# Altium PCB Logic adapter.PcbDoc
Units mm, origin at the board's own origin, x right, y up, seen from the top; angles counter-clockwise.
Board outline 50 x 30 mm, 2 copper layers (L1, L2), stack 0.93 mm thick; 81 components, 67 nets, 244 pads, 60 vias.
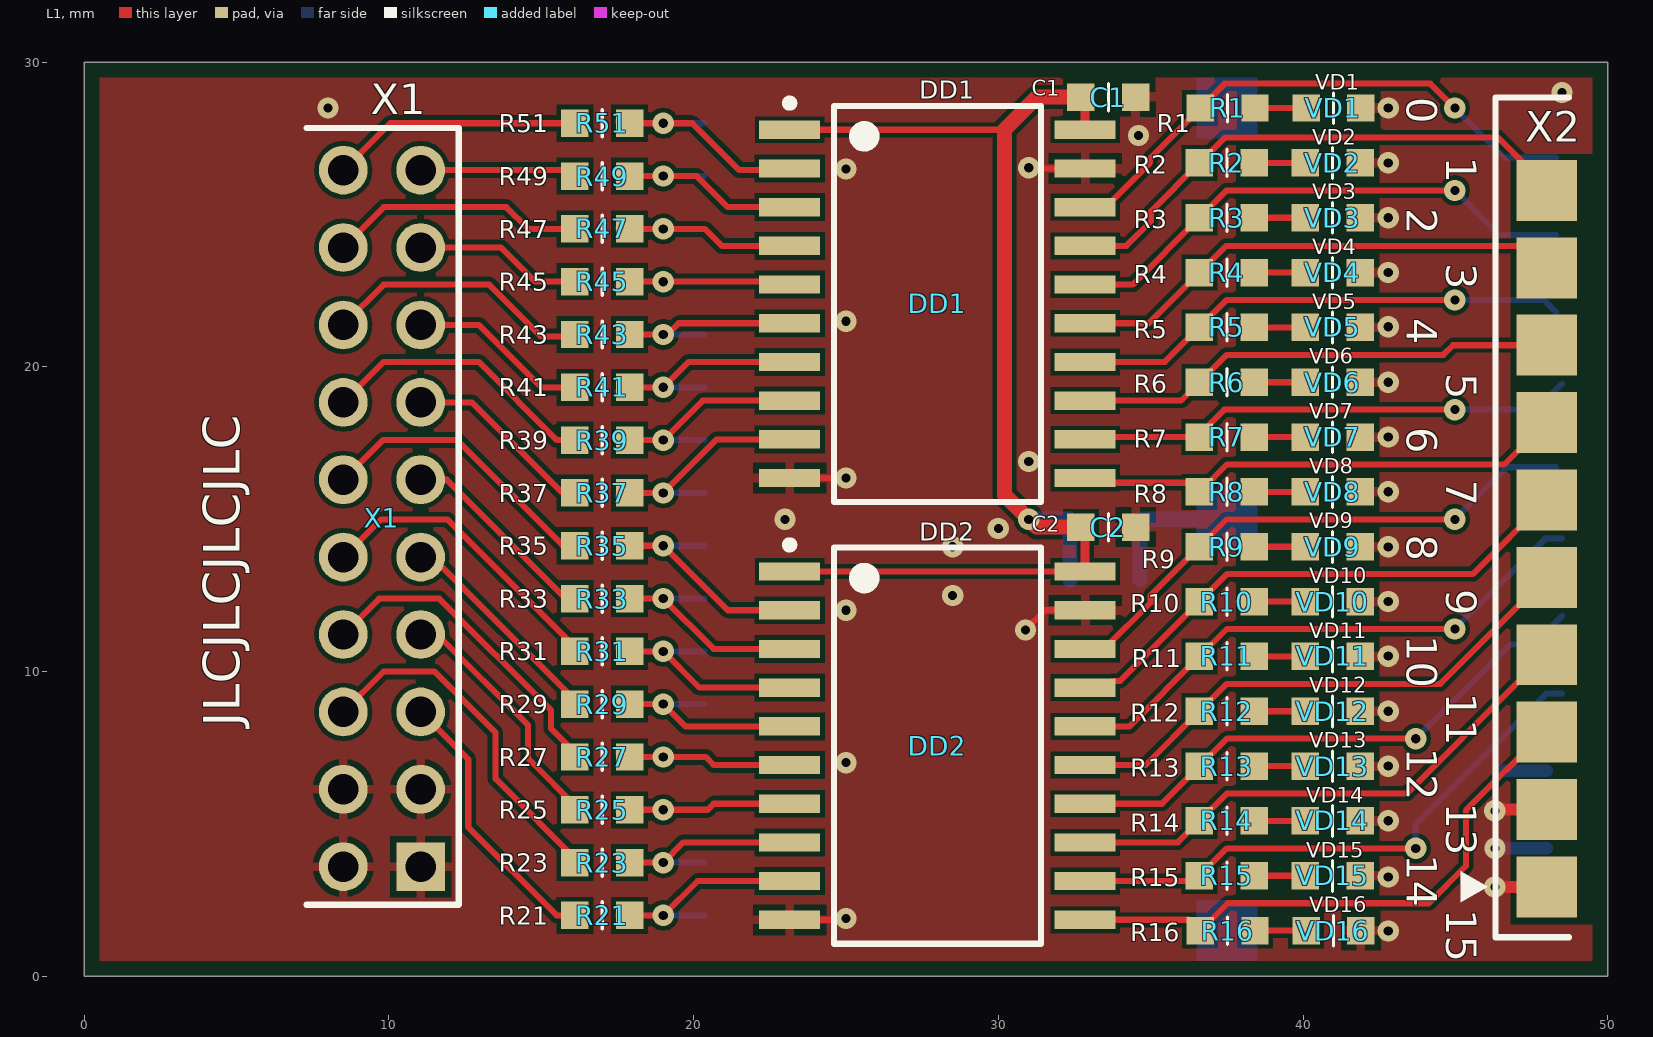
[diagram p0: L1 view]
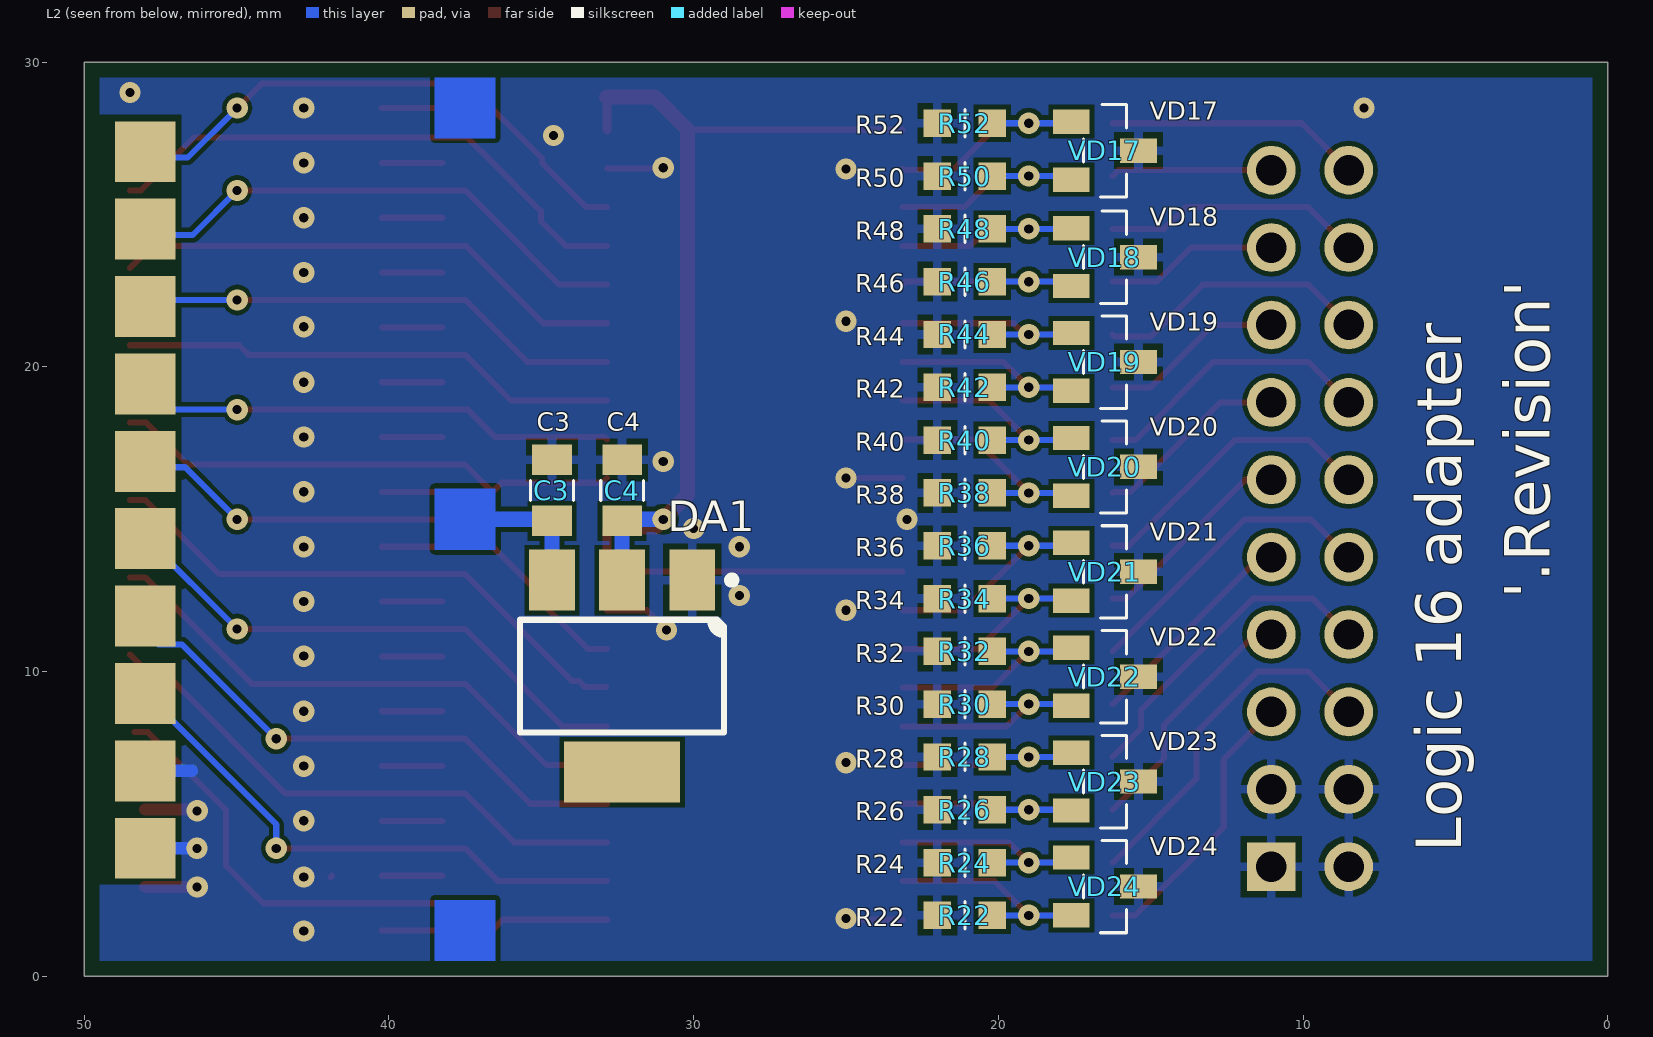
[diagram p1: L2 view, seen from below]
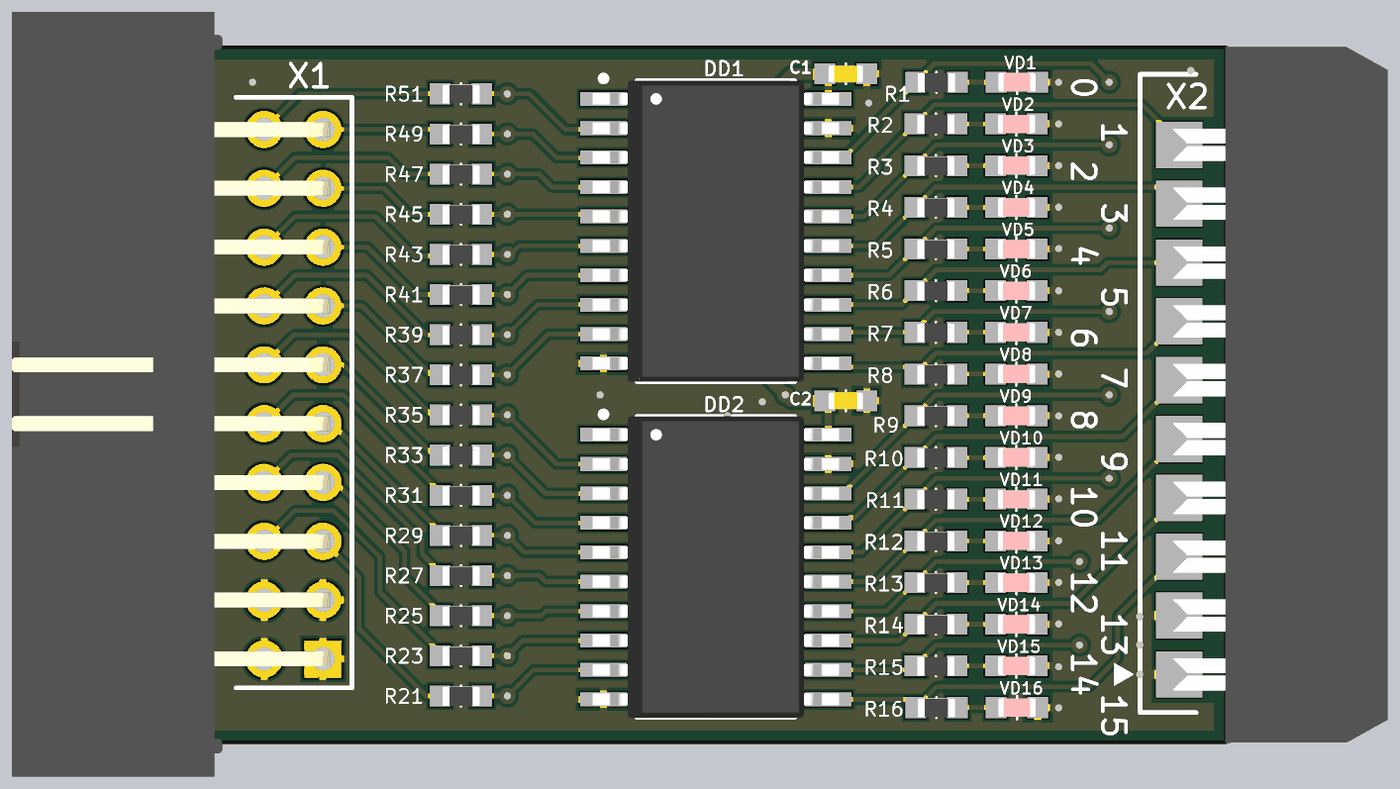
[diagram p2: 3D render of the assembled board from above, using the file's embedded part models]
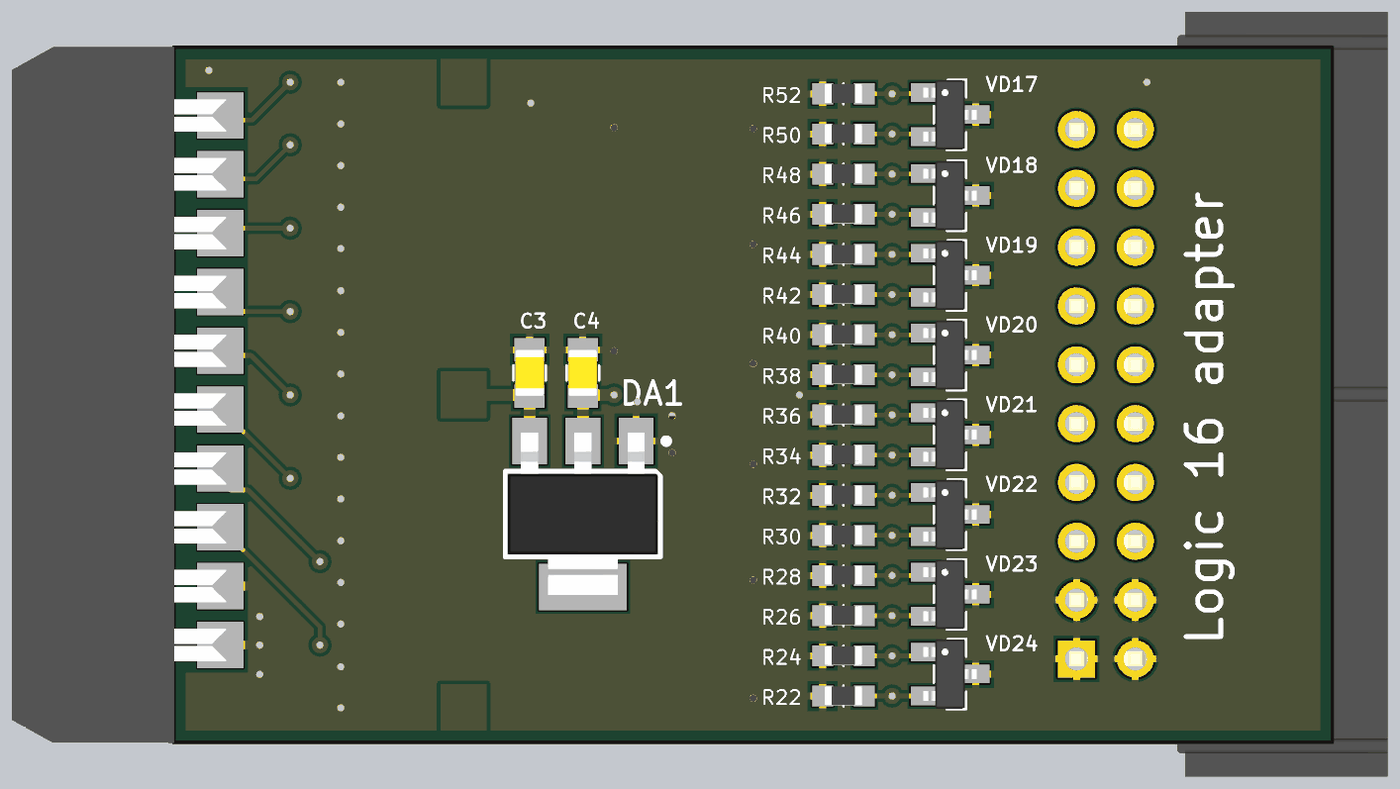
[diagram p3: 3D render of the assembled board from below, using the file's embedded part models]

## Layer stack, top to bottom
Top Solder: solder mask 0.03, Solder Resist, Dk 3.5
L1: signal copper 0.015
Core: core 0.9, FR-4, Dk 4.2
L2: signal copper 0.015
Bot Solder: solder mask 0.03, Solder Resist, Dk 3.5

## Board outline
0,0 50,0 50,30 0,30

## Design rules (kind name [scope] priority, off if disabled: settings)
BoardOutlineClearance KeepoutBoardOutline [(ObjectKind = 'Track') And (Keepout = 'True')] p1: gap=0 ignorepadtopadclearanceinfootprint=FALSE
BoardOutlineClearance IDC-20F [HasFootprint('IDC-20F-EDGE')] p2: gap=0 ignorepadtopadclearanceinfootprint=FALSE
BoardOutlineClearance BoardOutlineClearanceAll [All] p3: gap=0.5 ignorepadtopadclearanceinfootprint=FALSE
Clearance ClearanceNetA1_1 [InNet('NetA1_1')] p1 off: gap=0.15 ignorepadtopadclearanceinfootprint=FALSE except(0.2: Arc-Fill Arc-Poly Arc-Region Track-Fill Track-Poly Track-Region)
Clearance ClearanceTopSilk [OnLayer('Top Silk') vs OnLayer('L1')] p2: gap=0.15 ignorepadtopadclearanceinfootprint=FALSE except(0: Arc-Hole Track-Hole SMDPad-Hole THPad-Hole Via-Hole Fill-Hole Poly-Hole Region-Hole Text-Hole)
Clearance ClearanceBalun [HasFootprint('BALF-NRG-01D3')] p3: gap=0.1 ignorepadtopadclearanceinfootprint=FALSE except(0: Arc-Hole Track-Hole SMDPad-Hole THPad-Hole Via-Hole Fill-Hole Poly-Hole Region-Hole Text-Hole) // BALF-NRG-01D3
Clearance ClearanceBalun_CC112X [HasFootprint('BALF-112X-01D3')] p4: gap=0.1 ignorepadtopadclearanceinfootprint=FALSE except(0: Arc-Hole Track-Hole SMDPad-Hole THPad-Hole Via-Hole Fill-Hole Poly-Hole Region-Hole Text-Hole) // BALF-NRG-01D3
Clearance ClearancePolygonANT [InNet('ANT') vs InPoly] p5: gap=0.45 ignorepadtopadclearanceinfootprint=FALSE except(0: Arc-Hole Track-Hole SMDPad-Hole THPad-Hole Via-Hole Fill-Hole Poly-Hole Region-Hole Text-Hole)
Clearance Wire_Jumpers [HasFootprint('WIRE')] p6: gap=0.01 ignorepadtopadclearanceinfootprint=FALSE except(0: Arc-Hole Track-Hole SMDPad-Hole THPad-Hole Via-Hole Fill-Hole Poly-Hole Region-Hole Text-Hole) // Pour over wire jumpers
Clearance VD [All vs HasFootprint('DPF(S-PX2SON-N6)')] p7: gap=0.1 ignorepadtopadclearanceinfootprint=FALSE except(0: Arc-Hole Track-Hole SMDPad-Hole THPad-Hole Via-Hole Fill-Hole Poly-Hole Region-Hole Text-Hole) // For small diods (ECD protection)
Clearance L1 [OnLayer('L1')] p8: gap=0.15 ignorepadtopadclearanceinfootprint=FALSE except(0: Arc-Hole Track-Hole SMDPad-Hole THPad-Hole Via-Hole Fill-Hole Poly-Hole Region-Hole Text-Hole)
Clearance L2 [OnLayer('L2')] p9: gap=0.15 ignorepadtopadclearanceinfootprint=FALSE except(0: Arc-Hole Track-Hole SMDPad-Hole THPad-Hole Via-Hole Fill-Hole Poly-Hole Region-Hole Text-Hole)
ComponentClearance PowerConnector [(ObjectKind = '3D Body') And (Identifier = '039012040')] p1: gap=0 collisioncheckmode=3 verticalgap=0 showdistances=FALSE
ComponentClearance MezzanineConnectors [InComponent('X7') or InComponent('X8') vs (ObjectKind = '3D Body') And (Identifier = 'mezzanine')] p2: gap=0 collisioncheckmode=3 verticalgap=0 showdistances=FALSE
ComponentClearance [(ObjectKind = '3D Body') And (Identifier = '039012040')] p3: gap=0 collisioncheckmode=3 verticalgap=0 showdistances=TRUE
ComponentOrientations [All] p1: allowedrotations=32
DiffPairsRouting [All] p1: maxlimit=0.4 minlimit=0.4 mostfreqgap=0.4 toplayer_minwidth=0.15 toplayer_maxwidth=0.3 toplayer_prefwidth=0.3 bottomlayer_minwidth=0.15 bottomlayer_maxwidth=0.3 bottomlayer_prefwidth=0.3 maxuncoupledlength=12.7
HoleSize [All] p1: absolutevalues=TRUE maxlimit=3 minlimit=0.3 maxpercent=80.000 minpercent=20.000
HoleToHoleClearance [All] p1: gap=0.1 allowstackedmicrovias=TRUE
MatchedLengths USB2 [InNetClass('USB2')] p1: tolerance=1 checknetsindiffpair=TRUE checkdiffpairvsdiffpair=FALSE checkxsignals=FALSE checkothers=FALSE
MatchedLengths USB1 [InNetClass('USB1')] p2: tolerance=1 checknetsindiffpair=TRUE checkdiffpairvsdiffpair=FALSE checkxsignals=FALSE checkothers=FALSE
MatchedLengths BLE_SPI [InNetClass('BLE_SPI')] p3: tolerance=1 checknetsindiffpair=TRUE checkdiffpairvsdiffpair=FALSE checkxsignals=FALSE checkothers=FALSE
MatchedLengths ACEEL_SPI [InNetClass('ACC_SPI')] p4: tolerance=1 checknetsindiffpair=TRUE checkdiffpairvsdiffpair=FALSE checkxsignals=FALSE checkothers=FALSE
MatchedLengths DEBUG_Lengths [InNetClass('DEBUG')] p5: tolerance=1 checknetsindiffpair=TRUE checkdiffpairvsdiffpair=FALSE checkxsignals=FALSE checkothers=FALSE
MinimumAnnularRing MinimumAnnularRing_1 [(ObjectKind = 'Via') And (AsMM(PadXSize_TopLayer) = 0.4)] p1: minimumring=0
MinimumAnnularRing [(ObjectKind = 'Via') And (AsMM(PadXSize_TopLayer) <> 0.4)] p2: minimumring=0.2
MinimumSolderMaskSliver [All] p1 off: minsoldermaskwidth=0.148
NetAntennae Keepout [(ObjectKind = 'Track') And (Keepout = 'True')] p1: netantennaetolerance=100
PlaneClearance [All] p1: clearance=0.15
PlaneConnect [All] p1: planeconnectstyle=Relief reliefexpansion=0.5 reliefentries=4 reliefconductorwidth=0.25 reliefairgap=0.15
PolygonConnect PolygonConnect_Vias [(ObjectKind = 'Via')] p1: connectstyle=Direct reliefconductorwidth=0.254 reliefentries=4 polygonreliefangle="90 Angle" airgapwidth=0.254
PolygonConnect PolygonConnect_L2 [OnLayer('L2')] p2: connectstyle=Relief reliefconductorwidth=0.3 reliefentries=4 polygonreliefangle="90 Angle" airgapwidth=0.2
PolygonConnect PolygonConnect_L1 [OnLayer('L1')] p3: connectstyle=Relief reliefconductorwidth=0.3 reliefentries=4 polygonreliefangle="90 Angle" airgapwidth=0.2
RoutingCorners [All] p1: cornerstyle=45-Degree minsetback=2.5 maxsetback=2.5
RoutingVias [All] p1: holewidth=0.3 width=0.7 viastyle="Through Hole" minholewidth=0.3 minwidth=0.4 maxholewidth=0.3 maxwidth=0.7
SMDEntry [All] p1: side=TRUE corner=TRUE anyangle=TRUE
SMDToCorner [All] p1: distance=0
SMDToPlane [All] p1: distance=0
ShortCircuit NoNet [Not InAnyNet vs Not InAnyNet] p1: allowed=TRUE
SilkToSilkClearance [All] p1: silktosilkclearance=0
SilkToSolderMaskClearance [IsPad] p1: minsilkscreentomaskgap=0.02 clearancetoexposedcopper=TRUE
SolderMaskExpansion SolderMaskExpansion_Edge [OnLayer('Board')] p1: expansion=0.5 istentingtop=FALSE
SolderMaskExpansion SolderMaskKeepOut [OnLayer('Keepout')] p2: expansion=0.25 istentingtop=FALSE
SolderMaskExpansion [All] p3: expansion=0.075 istentingtop=FALSE
UnRoutedNet "Without GNDs" [not InNetClass('GND')] p1:
UnRoutedNet [All] p2 off:
Width "VD ESD" [InComponent('VD1')] p1: maxlimit=0.1 minlimit=0.1 preferedwidth=0.1
Width Width_GNDB [InNet('GNDB')] p2: maxlimit=0.254 minlimit=0.23 preferedwidth=0.23
Width Width_+V_BLE [InNet('+V_BLE')] p3: maxlimit=0.3 minlimit=0.23 preferedwidth=0.23
Width Width_GND [InNetClass('GND')] p4: maxlimit=5 minlimit=0.15 preferedwidth=0.3
Width Width_VDD [InNetClass('POWER')] p5: maxlimit=5 minlimit=0.15 preferedwidth=0.3
Width [All] p6: maxlimit=5 minlimit=0.15 preferedwidth=0.2
17 further rules are at their usual default settings.

## Components (designator, comment, footprint, x,y, rotation, side; value= is the part's Value field where it differs from the comment)
C1 "1u" C0603 33.61,28.86 r0 top
C2 "1u" C0603 33.61,14.745 r0 top
C3 "10u" C0805 34.65,15.95 r90 bottom
C4 "10u" C0805 32.35,15.95 r90 bottom
DA1 "=Value" "ON SEMI SOT-223 ST(318H)" 32.35,9.855 r270 bottom
DD1 "SN74AC245" "TI-SOIC20 DW" 28,22.071 r0 top
DD2 "SN74AC245" "TI-SOIC20 DW" 28,7.571 r0 top
R1 "1k" R0603 37.525,28.5 r0 top
R2 "1k" R0603 37.5,26.7 r0 top
R3 "1k" R0603 37.5,24.9 r0 top
R4 "1k" R0603 37.5,23.1 r0 top
R5 "1k" R0603 37.5,21.3 r0 top
R6 "1k" R0603 37.5,19.5 r0 top
R7 "1k" R0603 37.5,17.7 r0 top
R8 "1k" R0603 37.5,15.9 r0 top
R9 "1k" R0603 37.5,14.1 r0 top
R10 "1k" R0603 37.5,12.3 r0 top
R11 "1k" R0603 37.5,10.5 r0 top
R12 "1k" R0603 37.5,8.7 r0 top
R13 "1k" R0603 37.5,6.9 r0 top
R14 "1k" R0603 37.5,5.1 r0 top
R15 "1k" R0603 37.5,3.3 r0 top
R16 "1k" R0603 37.525,1.5 r0 top
R21 "10k" R0603 17,2 r0 top
R22 "100k" R0603 21.1,2 r0 bottom
R23 "10k" R0603 17,3.733 r0 top
R24 "100k" R0603 21.1,3.733 r0 bottom
R25 "10k" R0603 17,5.467 r0 top
R26 "100k" R0603 21.1,5.467 r0 bottom
R27 "10k" R0603 17,7.2 r0 top
R28 "100k" R0603 21.1,7.2 r0 bottom
R29 "10k" R0603 17,8.933 r0 top
R30 "100k" R0603 21.1,8.933 r0 bottom
R31 "10k" R0603 17,10.667 r0 top
R32 "100k" R0603 21.1,10.667 r0 bottom
R33 "10k" R0603 17,12.4 r0 top
R34 "100k" R0603 21.1,12.4 r0 bottom
R35 "10k" R0603 17,14.133 r0 top
R36 "100k" R0603 21.1,14.133 r0 bottom
R37 "10k" R0603 17,15.867 r0 top
R38 "100k" R0603 21.1,15.867 r0 bottom
R39 "10k" R0603 17,17.6 r0 top
R40 "100k" R0603 21.1,17.6 r0 bottom
R41 "10k" R0603 17,19.333 r0 top
R42 "100k" R0603 21.1,19.333 r0 bottom
R43 "10k" R0603 17,21.067 r0 top
R44 "100k" R0603 21.1,21.067 r0 bottom
R45 "10k" R0603 17,22.8 r0 top
R46 "100k" R0603 21.1,22.8 r0 bottom
R47 "10k" R0603 17,24.533 r0 top
R48 "100k" R0603 21.1,24.533 r0 bottom
R49 "10k" R0603 17,26.267 r0 top
R50 "100k" R0603 21.1,26.267 r0 bottom
R51 "10k" R0603 17,28 r0 top
R52 "100k" R0603 21.1,28 r0 bottom
VD1 "Red" "LTST-C193 RED" 41,28.5 r180 top
VD2 "Red" "LTST-C193 RED" 40.975,26.7 r180 top
VD3 "Red" "LTST-C193 RED" 40.975,24.9 r180 top
VD4 "Red" "LTST-C193 RED" 40.975,23.1 r180 top
VD5 "Red" "LTST-C193 RED" 40.975,21.3 r180 top
VD6 "Red" "LTST-C193 RED" 40.975,19.5 r180 top
VD7 "Red" "LTST-C193 RED" 40.975,17.7 r180 top
VD8 "Red" "LTST-C193 RED" 40.975,15.9 r180 top
VD9 "Red" "LTST-C193 RED" 40.975,14.1 r180 top
VD10 "Red" "LTST-C193 RED" 40.975,12.3 r180 top
VD11 "Red" "LTST-C193 RED" 40.975,10.5 r180 top
VD12 "Red" "LTST-C193 RED" 40.975,8.7 r180 top
VD13 "Red" "LTST-C193 RED" 40.975,6.9 r180 top
VD14 "Red" "LTST-C193 RED" 40.975,5.1 r180 top
VD15 "Red" "LTST-C193 RED" 40.975,3.3 r180 top
VD16 "Red" "LTST-C193 RED" 41,1.5 r180 top
VD17 "PESD3V3S2UT" NXP-SOT23 16.5,27.1 r180 bottom
VD18 "PESD3V3S2UT" NXP-SOT23 16.5,23.607 r180 bottom
VD19 "PESD3V3S2UT" NXP-SOT23 16.5,20.164 r180 bottom
VD20 "PESD3V3S2UT" NXP-SOT23 16.5,16.721 r180 bottom
VD21 "PESD3V3S2UT" NXP-SOT23 16.5,13.279 r180 bottom
VD22 "PESD3V3S2UT" NXP-SOT23 16.5,9.836 r180 bottom
VD23 "PESD3V3S2UT" NXP-SOT23 16.5,6.393 r180 bottom
VD24 "PESD3V3S2UT" NXP-SOT23 16.5,2.95 r180 bottom
X1 "BH-20R" BH-20R 11.04,3.6 r90 top locked
X2 "IDC-20F" IDC-20F-EDGE 50,15 r270 top locked

## Footprints (in the part's own frame and the unit in brackets; to place one, negate y for a bottom-side part, rotate by r counter-clockwise, add the part's x,y. Pads: shape width x height; smd on the part's side, far side on the other; paste and mask are expansions set on the pad)
BH-20R [mm]
  rect 1.6x1.6 hole 1 paste+1 mask+0.1: 1(0,0)
  round 1.6 hole 1 paste+1 mask+0.1: 2(0,2.54) 3(2.54,0) 4(2.54,2.54) 5(5.08,0) 6(5.08,2.54) 7(7.62,0) 8(7.62,2.54) 9(10.16,0) 10(10.16,2.54) 11(12.7,0) 12(12.7,2.54) 13(15.24,0) 14(15.24,2.54) 15(17.78,0) 16(17.78,2.54) 17(20.32,0) 18(20.32,2.54) 19(22.86,0) 20(22.86,2.54)
  silkscreen extent -1.25,-1.25 24.25,3.75, body extent -5.08,-0.32 27.94,13.44, height 9.11
C0603 [mm]
  rect 0.9x0.9 smd: 1(-0.9,0) 2(0.9,0)
  silkscreen extent 0,-0.45 0,0.45, body extent -0.76,-0.38 0.76,0.38, height 0.76
C0805 [mm]
  rect 1x1.3 smd: 1(-1,0) 2(1,0)
  silkscreen extent -0.33,-0.7 0.33,0.7, body extent -1.02,-0.63 1.02,0.64, height 1.27
IDC-20F-EDGE [mm]
  rect 2x2 smd mask+0.06: 1(12.065,-2) 3(9.525,-2) 5(6.985,-2) 7(4.445,-2) 9(1.905,-2) 11(-0.635,-2) 13(-3.175,-2) 15(-5.715,-2) 17(-8.255,-2) 19(-10.795,-2)
  rect 2x2 smd far side mask+0.06: 2(10.795,-2) 4(8.255,-2) 6(5.715,-2) 8(3.175,-2) 10(0.635,-2) 12(-1.905,-2) 14(-4.445,-2) 16(-6.985,-2) 18(-9.525,-2) 20(-12.065,-2)
  L1 pour cut-out: 13.3,0 -12,0 -12,-3.2 13.3,-3.2
  L2 pour cut-out: 12,0 -13.3,0 -13.3,-3.2 12,-3.2
  silkscreen extent -13.84,-4.83 13.72,-1.27, body extent -15.03,-2.25 15.03,7, height 3.44
"LTST-C193 RED" [mm]
  rect 0.9x0.9 smd: 1(-0.9,0) 2(0.9,0)
  silkscreen extent 0,-0.5 0,0.51, body extent -0.8,-0.4 0.8,0.4, height 0.36
NXP-SOT23 [mm] "SOT23, 3-Leads, Body 3.0x2.6mm (max), Pitch 0.95mm, IPC High Density"
  rect 1.2x0.8 smd: 1(-1.1,0.95) 2(-1.1,-0.95) 3(1.1,0)
  silkscreen extent -0.7,-1.52 0.7,1.51, body extent -1.15,-1.5 1.15,1.5, height 1.01
"ON SEMI SOT-223 ST(318H)" [mm] "SOT223, 4-Leads, Body 6.50x7.00mm (avg), Pitch 2.30mm, IPC Medium Density"
  rect 2x1.5 smd: 1(-3.15,2.3) 2(-3.15,0) 3(-3.15,-2.3)
  rect 2x3.8 smd: 4(3.15,0)
  silkscreen extent -3.27,-3.35 1.85,3.72, body extent -3.52,-3.25 3.5,3.25, height 1.8
R0603 [mm] "Chip Resistor, 2-Leads, Body 1.60x0.80mm, IPC Medium Density"
  rect 0.9x0.9 smd: 1(-0.9,0) 2(0.9,0)
  silkscreen extent 0,-0.45 0,0.45, body extent -0.8,-0.42 0.8,0.4, height 0.46
"TI-SOIC20 DW" [mm]
  rect 2x0.6 smd: 1(-4.85,5.715) 2(-4.85,4.445) 3(-4.85,3.175) 4(-4.85,1.905) 5(-4.85,0.635) 6(-4.85,-0.635) 7(-4.85,-1.905) 8(-4.85,-3.175) 9(-4.85,-4.445) 10(-4.85,-5.715) 11(4.85,-5.715) 12(4.85,-4.445) 13(4.85,-3.175) 14(4.85,-1.905) 15(4.85,-0.635) 16(4.85,0.635) 17(4.85,1.905) 18(4.85,3.175) 19(4.85,4.445) 20(4.85,5.715)
  silkscreen extent -4.97,-6.5 3.4,6.71, body extent -5.31,-6.5 5.32,6.5, height 2.66

## Part data
C1 C2: library part "C0603 1u 10V X6S 105°C ±20%", "General  ceramic capacitor", Dielectric=X6S, LCSC Part #=C15849, Package=C0603, Part Number=GRM185C81A105ME36#, Temperature=105°C, Tolerance=±20%, Voltage=10V, Component Name="C0603 1u 10V X6S 105°C ±20%", HelpURL=https://psearch.en.murata.com/capacitor/result/smd/?pid=GRM185C81A105ME36#, Pins=2, Vendor=Murata
C3 C4: library part "C0805 10u 10V X6S 105°C ±10%", "General  ceramic capacitor", Dielectric=X6S, LCSC Part #=C1046, Package=C0805, Part Number=GRM21BC81A106KE18#, Temperature=105°C, Tolerance=±10%, Voltage=10V, Alt Part=C2012X6S1A106K085AC(TDK), Component Name="C0805 10u 10V X6S 105°C ±10%", HelpURL=https://psearch.en.murata.com/capacitor/result/smd/?pid=GRM21BC81A106KE18#, Pins=2, Vendor=Murata
DA1: library part LD1117STR, "LDO ADJ 0.8mA", LCSC Part #=C426566, Package=SOT-223, Component Name=LD1117STR, HelpURL=https://www.chipdip.ru/product/ld1117str-2, Part Number=LD1117STR, Pins=4, Vendor=ON
DD1 DD2: library part SN74AC245DW, "Octal bus transceiver", LCSC Part #=C354145, Package=SOIC20, Component Name=SN74AC245DW, HelpURL=https://www.ti.com/product/SN74AC245, Part Number=SN74AC245DW, Pins=20, Vendor=TI
R1 R2 R3 R4 R5 R6 R7 R8 R9 R10 R11 R12 R13 R14 R15 R16: library part "R0603 1k ±1% E24", "Thick Film Chip Resistor - CR Series", LCSC Part #=C21190, Package=R0603, Part Number=CR-03FL7----1k, Power=1/10W, Tolerance=±1%, Voltage=75V, Alt Part="RTT031001FTH (Ralec)", Component Name="R0603 1k ±1% E24", HelpURL=https://www.viking.com.tw/en/search/index.html?f%5Bname_model%5D=CR-03FL7----1k&type=product, Pins=2, Price=0.001, Vendor=Viking
R21 R23 R25 R27 R29 R31 R33 R35 R37 R39 R41 R43 R45 R47 R49 R51: library part "R0603 10k ±1% E24", "Thick Film Chip Resistor - CR Series", LCSC Part #=C25804, Package=R0603, Part Number=CR-03FL7---10k, Power=1/10W, Tolerance=±1%, Voltage=75V, Alt Part="RTT031002FTH (Ralec)", Component Name="R0603 10k ±1% E24", HelpURL=https://www.viking.com.tw/en/search/index.html?f%5Bname_model%5D=CR-03FL7---10k&type=product, Pins=2, Price=0.001, Vendor=Viking
R22 R24 R26 R28 R30 R32 R34 R36 R38 R40 R42 R44 R46 R48 R50 R52: library part "R0603 100k ±1% E24", "Thick Film Chip Resistor - CR Series", LCSC Part #=C25803, Package=R0603, Part Number=CR-03FL7--100k, Power=1/10W, Tolerance=±1%, Voltage=75V, Alt Part="RTT031003FTH (Ralec)", Component Name="R0603 100k ±1% E24", HelpURL=https://www.viking.com.tw/en/search/index.html?f%5Bname_model%5D=CR-03FL7--100k&type=product, Pins=2, Price=0.001, Vendor=Viking
VD1 VD2 VD3 VD4 VD5 VD6 VD7 VD8 VD9 VD10 VD11 VD12 VD13 VD14 VD15 VD16: library part "0603 0h35 5mA RED KRKT", "TopView Single Color Chip LED", Current=5mA, LCSC Part #=C157741, Package="0603 0h35", Part Number=LTST-C193KRKT-5A, Brightness="7.1~45 @ 5mA", Component Name="0603 0h35 5mA RED KRKT", HelpURL=http://optoelectronics.liteon.com/en-global/Led/LED-Component/Detail/448?param4=1, Pins=2, Vendor=Lite-On, Wavelength="631 @ 5mA"
VD17 VD18 VD19 VD20 VD21 VD22 VD23 VD24: "Double ESD protection diodes", LCSC Part #=C84276, Package=SOT-23, Component Name=PESD3V3S2UT, HelpURL=https://static.chipdip.ru/lib/583/DOC001583051.pdf, Part Number=PESD3V3S2UT, Pins=3, Vendor=NXP
X1: "2.54mm IDC right angle", LCSC Part #=C9144, Component Name=BH-20R, Part Number=BH-20R, Pins=20
X2: library part IDC-20F-EDGE, LCSC Part #=C20346, Component Name=IDC-20F-EDGE, Part Number=IDC-20F, Pins=20

## Via types
v1: diameter 0.7, hole 0.3, L1 to L2, tented both sides, 60 vias

## Nets (pads, with @x,y where several pads share a name; then routed paths per layer and width w, separated by ;. In a path a pad name is that pad's centre, name@x,y a point inside that pad or via, vN(x,y) a via of type N, cw(c..) or ccw(c..) an arc to the next point about the centre after c; other vN are vias at no path point)
3V: C1.1 C2.1 C4.1 DA1.2 DD1.1 DD1.20 DD2.1 DD2.20 | length 41
  L1 w0.2: DD2.1 DD2.20 ; DD1.1 30.2,27.786 ; C1.1@32.85,28.721 C1.1@32.85,28.85
  L1 w0.3: C2.1 32.85,14.605 DD2.20 ; C1.1 32.85,28.721 DD1.20
  L1 w0.5: C2.1 31.255,14.745 v1(31,15) 30.2,15.8 30.2,27.786 31.275,28.86 C1.1 32.84,28.86 C1.1@32.85,28.85
  L2 w0.5: v1@31,14.946 v1(31,15) 32.35,15 DA1.2
5V: C3.1 DA1.3 | length 4.3
  L2 w0.5: DA1.3 34.65,15 36.992,15 37,15.008
Ch1: DD1.18 R1.1 X2.20 | length 18.2
  L1 w0.2: DD1.18 33.521,25.246 34.983,26.708 34.983,26.858 R1.1 37.425,29.3 44.184,29.3 v1(44.984,28.5)
  L2 w0.2: v1(44.984,28.5) 46.614,26.87 X2.20@48.305,26.87
Ch1A: DD1.2 R51.2 R52.1 VD17.1 | length 8.9
  L1 w0.2: R51.2@17.75,28 v1(19,28) 19.96,28 21.5,26.46 23.094,26.46 DD1.2
  L2 w0.2: VD17.1@17.5,28.05 17.55,28 v1(19,28) R52.1@20.35,28
Ch2: DD1.17 R2.1 X2.19 | length 18
  L1 w0.2: DD1.17 34.2,23.976 35.016,24.792 35.016,25.116 R2.1 37.431,27.531 46.403,27.531 48.14,25.795 X2.19@48.5,25.795
Ch2A: DD1.3 R49.2 R50.1 VD17.2 | length 8.7
  L1 w0.2: R49.2@17.75,26.267 v1(19,26.267) 20.1,26.267 21.121,25.246 DD1.3
  L2 w0.2: VD17.2@17.5,26.15 17.617,26.267 v1(19,26.267) R50.1@20.35,26.267
Ch3: DD1.16 R3.1 X2.18 | length 17.3
  L1 w0.2: DD1.16 34.406,22.706 R3.1 37.495,25.795 v1(44.984,25.795)
  L2 w0.2: v1(44.984,25.795) 46.449,24.33 X2.18@48.305,24.33
Ch3A: DD1.4 R47.2 R48.1 VD18.1 | length 8.5
  L1 w0.2: R47.2@17.75,24.533 v1(19,24.533) 20.367,24.533 20.924,23.976 DD1.4
  L2 w0.2: VD18.1@17.5,24.557 17.524,24.533 v1(19,24.533) R48.1@20.35,24.533
Ch4: DD1.15 R4.1 X2.17 | length 17
  L1 w0.2: DD1.15 34.936,21.436 R4.1 37.476,23.976 47.779,23.976 X2.17@48.5,23.255
Ch4A: DD1.5 R45.2 R46.1 VD18.2 | length 8.3
  L1 w0.2: R45.2@17.75,22.8 v1(19,22.8) 23.056,22.8 DD1.5
  L2 w0.2: VD18.2@17.5,22.657 17.643,22.8 v1(19,22.8) R46.1@20.35,22.8
Ch5: DD1.14 R5.1 X2.16 | length 16.5
  L1 w0.2: DD1.14 35.466,20.166 R5.1 37.5,22.2 v1(44.984,22.2)
  L2 w0.2: v1(44.984,22.2) 47.895,22.2 X2.16@48.305,21.79
Ch5A: DD1.6 R43.2 R44.1 VD19.1 | length 8.4
  L1 w0.2: R43.2@17.75,21.067 v1(19,21.067) 19.135,21.067 19.504,21.436 DD1.6
  L2 w0.2: VD19.1@17.5,21.114 17.548,21.067 v1(19,21.067) R44.1@20.35,21.067
Ch6: DD1.13 R6.1 X2.15 | length 16.4
  L1 w0.2: DD1.13 35.996,18.896 R6.1 37.5,20.4 44.609,20.4 44.924,20.715 X2.15@48.5,20.715
Ch6A: DD1.7 R41.2 R42.1 VD19.2 | length 8.6
  L1 w0.2: R41.2@17.75,19.333 v1(19,19.333) 19.833,20.166 DD1.7
  L2 w0.2: VD19.2@17.5,19.214 17.619,19.333 v1(19,19.333) R42.1@20.35,19.333
Ch7: DD1.12 R7.1 X2.14 | length 16.4
  L1 w0.2: DD1.12 32.924,17.7 36.51,17.7 37.411,18.6 v1(44.984,18.6)
  L2 w0.2: v1(44.984,18.6) 47.655,18.6 X2.14@48.5,19.445
Ch7A: DD1.8 R39.2 R40.1 VD20.1 | length 8.8
  L1 w0.2: R39.2@17.75,17.6 v1(19,17.6) 20.296,18.896 DD1.8
  L2 w0.2: VD20.1@17.5,17.671 17.571,17.6 v1(19,17.6) R40.1@20.35,17.6
Ch8: DD1.11 R8.1 X2.13 | length 16.7
  L1 w0.2: DD1.11 33.006,16.2 36.3,16.2 R8.1 ; R8.1@36.675,15.975 37.5,16.8 46.6,16.8 47.975,18.175 X2.13@48.5,18.175
Ch8A: DD1.9 R37.2 R38.1 VD20.2 | length 9
  L1 w0.2: R37.2@17.75,15.867 v1(19,15.867) 20.759,17.626 DD1.9
  L2 w0.2: VD20.2@17.5,15.771 17.595,15.867 v1(19,15.867) R38.1@20.35,15.867
Ch9: DD2.18 R9.1 X2.12 | length 18.1
  L1 w0.2: DD2.18 33.48,10.746 35.004,12.27 35.004,12.504 R9.1 37.5,15 v1(44.984,15)
  L2 w0.2: v1(44.984,15) 46.694,16.71 X2.12@48.305,16.71
Ch9A: DD2.2 R35.2 R36.1 VD21.1 | length 9.2
  L1 w0.2: R35.2@17.75,14.133 v1(19,14.133) 21.118,12.016 DD2.2
  L2 w0.2: VD21.1@17.5,14.229 17.595,14.133 v1(19,14.133) R36.1@20.35,14.133
Ch10: DD2.17 R10.1 X2.11 | length 18.2
  L1 w0.2: DD2.17@32.874,9.5 33.574,9.5 33.774,9.7 34,9.7 R10.1 37.5,13.2 45.565,13.2 X2.11 X2.11@48.5,15.635
Ch10A: DD2.3 R33.2 R34.1 VD21.2 | length 9
  L1 w0.2: R33.2@17.75,12.4 v1(19,12.4) 20.654,10.746 DD2.3
  L2 w0.2: VD21.2@17.5,12.329 17.571,12.4 v1(19,12.4) R34.1@20.35,12.4
Ch11: DD2.16 R11.1 X2.10 | length 18.2
  L1 w0.2: DD2.16 34.306,8.206 R11.1 37.5,11.4 v1(44.984,11.4)
  L2 w0.2: v1(44.984,11.4) 47.949,14.365 X2.10@48.5,14.365
Ch11A: DD2.4 R31.2 R32.1 VD22.1 | length 8.8
  L1 w0.2: R31.2@17.75,10.667 v1(19,10.667) 20.191,9.476 DD2.4
  L2 w0.2: VD22.1@17.5,10.786 17.619,10.667 v1(19,10.667) R32.1@20.35,10.667
Ch12: DD2.15 R12.1 X2.9 | length 18.2
  L1 w0.2: DD2.15 34.836,6.936 R12.1 37.5,9.6 44.505,9.6 X2.9 X2.9@48.5,13.095
Ch12A: DD2.5 R29.2 R30.1 VD22.2 | length 8.6
  L1 w0.2: R29.2@17.75,8.933 v1(19,8.933) 19.728,8.206 DD2.5
  L2 w0.2: VD22.2@17.5,8.886 17.548,8.933 v1(19,8.933) R30.1@20.35,8.933
Ch13: DD2.14 R13.1 X2.8 | length 18.2
  L1 w0.2: DD2.14 35.366,5.666 R13.1 37.5,7.8 v1(43.7,7.8)
  L2 w0.2: v1(43.7,7.8) 46.79,10.89 47.565,10.89 X2.8@48.5,11.825
Ch13A: DD2.6 R27.2 R28.1 VD23.1 | length 8.4
  L1 w0.2: R27.2@17.75,7.2 v1(19,7.2) 20.39,7.2 20.654,6.936 DD2.6
  L2 w0.2: VD23.1@17.5,7.343 17.643,7.2 v1(19,7.2) R28.1@20.35,7.2
Ch14: DD2.13 R14.1 X2.7 | length 18.2
  L1 w0.2: DD2.13 35.896,4.396 R14.1 37.5,6 43.4,6 47.055,9.655 47.6,9.655 X2.7@48.5,10.555
Ch14A: DD2.7 R25.2 R26.1 VD23.2 | length 8.3
  L1 w0.2: R25.2@17.75,5.467 v1(19,5.467) 20.455,5.467 20.654,5.666 DD2.7
  L2 w0.2: VD23.2@17.5,5.443 17.524,5.467 v1(19,5.467) R26.1@20.35,5.467
Ch15: DD2.12 R15.1 X2.6 | length 18.7
  L1 w0.2: DD2.12 36.426,3.126 R15.1 37.5,4.2 v1(43.7,4.2)
  L2 w0.2: v1(43.7,4.2) 43.7,4.985 X2.6 X2.6@48.5,9.285
Ch15A: DD2.8 R23.2 R24.1 VD24.1 | length 8.6
  L1 w0.2: R23.2@17.75,3.733 v1(19,3.733) ; v1(19,3.733) 19.662,4.396 DD2.8
  L2 w0.2: VD24.1@17.5,3.9 17.667,3.733 v1(19,3.733) R24.1@20.35,3.733
Ch16: DD2.11 R16.1 X2.5 | length 19.4
  L1 w0.2: DD2.11 36.269,1.856 R16.1 37.525,2.4 44.123,2.4 45.344,3.621 45.344,5.446 47.913,8.015 X2.5@48.358,8.015
Ch16A: DD2.9 R21.2 R22.1 VD24.2 | length 8.7
  L1 w0.2: R21.2@17.75,2 v1(19,2) 20.126,3.126 DD2.9
  L2 w0.2: VD24.2@17.5,2 v1(19,2) R22.1@20.35,2
GND: C1.2 C2.2 C3.2 C4.2 DA1.1 DD1.10 DD1.19 DD2.10 DD2.19 R22.2 R24.2 R26.2 R28.2 R30.2 R32.2 R34.2 R36.2 R38.2 R40.2 R42.2 R44.2 R46.2 R48.2 R50.2 R52.2 VD1.1 VD2.1 VD3.1 VD4.1 VD5.1 VD6.1 VD7.1 VD8.1 VD9.1 VD10.1 VD11.1 VD12.1 VD13.1 VD14.1 VD15.1 VD16.1 VD17.3 VD18.3 VD19.3 VD20.3 VD21.3 VD22.3 VD23.3 VD24.3 X1.1 X1.2 X1.3 X1.4 X2.1 X2.2 X2.3 X2.4 | length 14.5
  L1 w0.2: DD2.10 24.956,1.856 v1(25,1.9) ; DD1.10 v1(25,16.356) ; v1(30.89,11.369) 31.538,12.016 DD2.19 ; v1(31,26.541) 31.025,26.516 DD1.19 ; VD15.1 VD15.1@41.913,3.262
  L1 w0.3: v1(46.298,5.43) v1@46.342,5.475
  L1 w0.4: v1(46.298,2.935) X2.1 ; v1@46.342,5.475 X2.3
  L2 w0.4: v1@46.3,4.205 X2.2 ; 46.474,6.745 X2.4
  other v1: 42.8,1.49 42.8,3.262 46.3,4.2 42.8,5.106 42.8,6.9 25,7.013 42.8,8.7 42.8,10.51 25,12.016 42.8,12.305 28.5,12.5 28.5,14.1 42.8,14.095 30,14.7 23,15 42.8,15.906 31,16.9 42.8,17.7 42.8,19.5 42.8,21.322 25,21.5 42.8,23.1 42.8,24.9 25,26.5 42.8,26.7 34.6,27.6 8,28.5 42.8,28.5 48.5,29.01
NetR1_2: R1.2 VD1.2 | length 2
  L1 w0.2: R1.2@38.275,28.5 VD1.2@40.25,28.5
NetR2_2: R2.2 VD2.2 | length 2
  L1 w0.2: R2.2@38.25,26.7 VD2.2@40.225,26.7
NetR3_2: R3.2 VD3.2 | length 2
  L1 w0.2: R3.2@38.25,24.9 VD3.2@40.225,24.9
NetR4_2: R4.2 VD4.2 | length 2
  L1 w0.2: R4.2@38.25,23.1 VD4.2@40.225,23.1
NetR5_2: R5.2 VD5.2 | length 2
  L1 w0.2: R5.2@38.25,21.3 VD5.2@40.225,21.3
NetR6_2: R6.2 VD6.2 | length 2
  L1 w0.2: R6.2@38.25,19.5 VD6.2@40.225,19.5
NetR7_2: R7.2 VD7.2 | length 2
  L1 w0.2: R7.2@38.25,17.7 VD7.2@40.225,17.7
NetR8_2: R8.2 VD8.2 | length 2
  L1 w0.2: R8.2@38.25,15.9 VD8.2@40.225,15.9
NetR9_2: R9.2 VD9.2 | length 2
  L1 w0.2: R9.2@38.25,14.1 VD9.2@40.225,14.1
NetR10_2: R10.2 VD10.2 | length 2
  L1 w0.2: R10.2@38.25,12.3 VD10.2@40.225,12.3
NetR11_2: R11.2 VD11.2 | length 2
  L1 w0.2: R11.2@38.25,10.5 VD11.2@40.225,10.5
NetR12_2: R12.2 VD12.2 | length 2
  L1 w0.2: R12.2@38.25,8.7 VD12.2@40.225,8.7
NetR13_2: R13.2 VD13.2 | length 2
  L1 w0.2: R13.2@38.25,6.9 VD13.2@40.225,6.9
NetR14_2: R14.2 VD14.2 | length 2
  L1 w0.2: R14.2@38.25,5.1 VD14.2@40.225,5.1
NetR15_2: R15.2 VD15.2 | length 2
  L1 w0.2: R15.2@38.25,3.3 VD15.2@40.225,3.3
NetR16_2: R16.2 VD16.2 | length 2
  L1 w0.2: R16.2@38.275,1.5 VD16.2@40.25,1.5
NetR21_1: R21.1 X1.5 | length 9.3
  L1 w0.2: X1.5 12.6,7.12 12.6,4.9 15.5,2 R21.1@16.25,2
NetR23_1: R23.1 X1.6 | length 11.8
  L1 w0.2: X1.6 9.82,10 11.5,10 13.5,8 13.5,6.484 R23.1@16.25,3.733
NetR25_1: R25.1 X1.7 | length 8.2
  L1 w0.2: X1.7 11.589,11.22 14.567,8.242 14.567,7.15 R25.1@16.25,5.467
NetR27_1: R27.1 X1.8 | length 10.7
  L1 w0.2: X1.8 9.68,12.4 11.656,12.4 15.32,8.736 15.32,8.13 R27.1@16.25,7.2
NetR29_1: R29.1 X1.9 | length 7.2
  L1 w0.2: X1.9 11.423,13.76 R29.1@16.25,8.933
NetR31_1: R31.1 X1.10 | length 10.1
  L1 w0.2: X1.10 9.74,15 11.917,15 R31.1@16.25,10.667
NetR33_1: R33.1 X1.11 | length 6.8
  L1 w0.2: X1.11 11.9,16.3 15.8,12.4 R33.1@16.25,12.4
NetR35_1: R35.1 X1.12 | length 9.7
  L1 w0.2: X1.12 9.8,17.6 12.245,17.6 15.712,14.133 R35.1@16.25,14.133
NetR37_1: R37.1 X1.13 | length 6.4
  L1 w0.2: X1.13 12.718,18.84 15.658,15.9 16.217,15.9 R37.1@16.25,15.867
NetR39_1: R39.1 X1.14 | length 9.4
  L1 w0.2: X1.14 9.826,20.166 12.944,20.166 15.51,17.6 R39.1@16.25,17.6
NetR41_1: R41.1 X1.15 | length 6.1
  L1 w0.2: X1.15 12.953,21.38 15,19.333 R41.1@16.25,19.333
NetR43_1: R43.1 X1.16 | length 9
  L1 w0.2: X1.16 9.826,22.706 13.294,22.706 15,21 16.183,21 R43.1@16.25,21.067
NetR45_1: R45.1 X1.17 | length 5.7
  L1 w0.2: X1.17 13.68,23.92 14.8,22.8 R45.1@16.25,22.8
NetR47_1: R47.1 X1.18 | length 8.6
  L1 w0.2: X1.18 9.826,25.246 13.854,25.246 14.567,24.533 R47.1@16.25,24.533
NetR49_1: R49.1 X1.19 | length 5.3
  L1 w0.2: X1.19 16.057,26.46 R49.1@16.25,26.267
NetR51_1: R51.1 X1.20 | length 8.4
  L1 w0.2: X1.20 10.04,28 R51.1@16.25,28
pads on no net: DA1.4

## Polygon pours and split planes (outlines as drawn)
GND on L2 "L2-No Net" (solid, pour order 0): 0,30 50,30 50,0 0,0
GND on L1 "L1-No Net" (solid, pour order 4): 0,30 50,30 50,0 0,0

## Other copper
L2:
  rectangle net 5V: 36.5,0.5 38.5,2.51
  rectangle net 5V: 36.5,27.5 38.5,29.51
  rectangle net 5V: 36.5,14 38.5,16.017

## Silkscreen, mask and mechanical layers (free items; w line width, h text height)
Top Overlay:
  text "0" at 43.398,28.85 h1 r270
  text "1" at 44.7,26.9 h1 r270
  text "2" at 43.398,25.214 h1 r270
  text "3" at 44.7,23.4 h1 r270
  text "4" at 43.4,21.6 h1 r270
  text "5" at 44.7,19.8 h1 r270
  text "6" at 43.398,18.029 h1 r270
  text "7" at 44.7,16.3 h1 r270
  text "8" at 43.398,14.494 h1 r270
  text "9" at 44.7,12.7 h1 r270
  text "10" at 43.4,11.2 h1 r270
  text "11" at 44.7,9.3 h1 r270
  text "JLCJLCJLCJLC" at 5.1,8.2 h1.2 r90
  text "12" at 43.4,7.5 h1 r270
  text "13" at 44.7,5.7 h1 r270
  text "14" at 43.4,4 h1 r270
  text "15" at 44.7,2.2 h1 r270
Bot Overlay:
  text "'.Revision'" at 1.9,12.4 h1.5 r270
  text "Logic 16 adapter" at 4.8,4.079 h1.5 r270
Top Solder:
  the board outline again, w0.15
Bot Solder:
  the board outline again, w0.15
Board:
  the board outline again, w0.15

## Dimensions
50,30 to 0,30 on Dimentions
50,0 to 50,30 on Dimentions